# Altium PCB IcanStudioLive Controller.PcbDoc
Units mm, origin at the board's own origin, x right, y up, seen from the top; angles counter-clockwise.
Board outline 110.49 x 59.06 mm, 2 copper layers (Top Layer, Bottom Layer); 19 components, 23 nets, 109 pads, 1 vias.
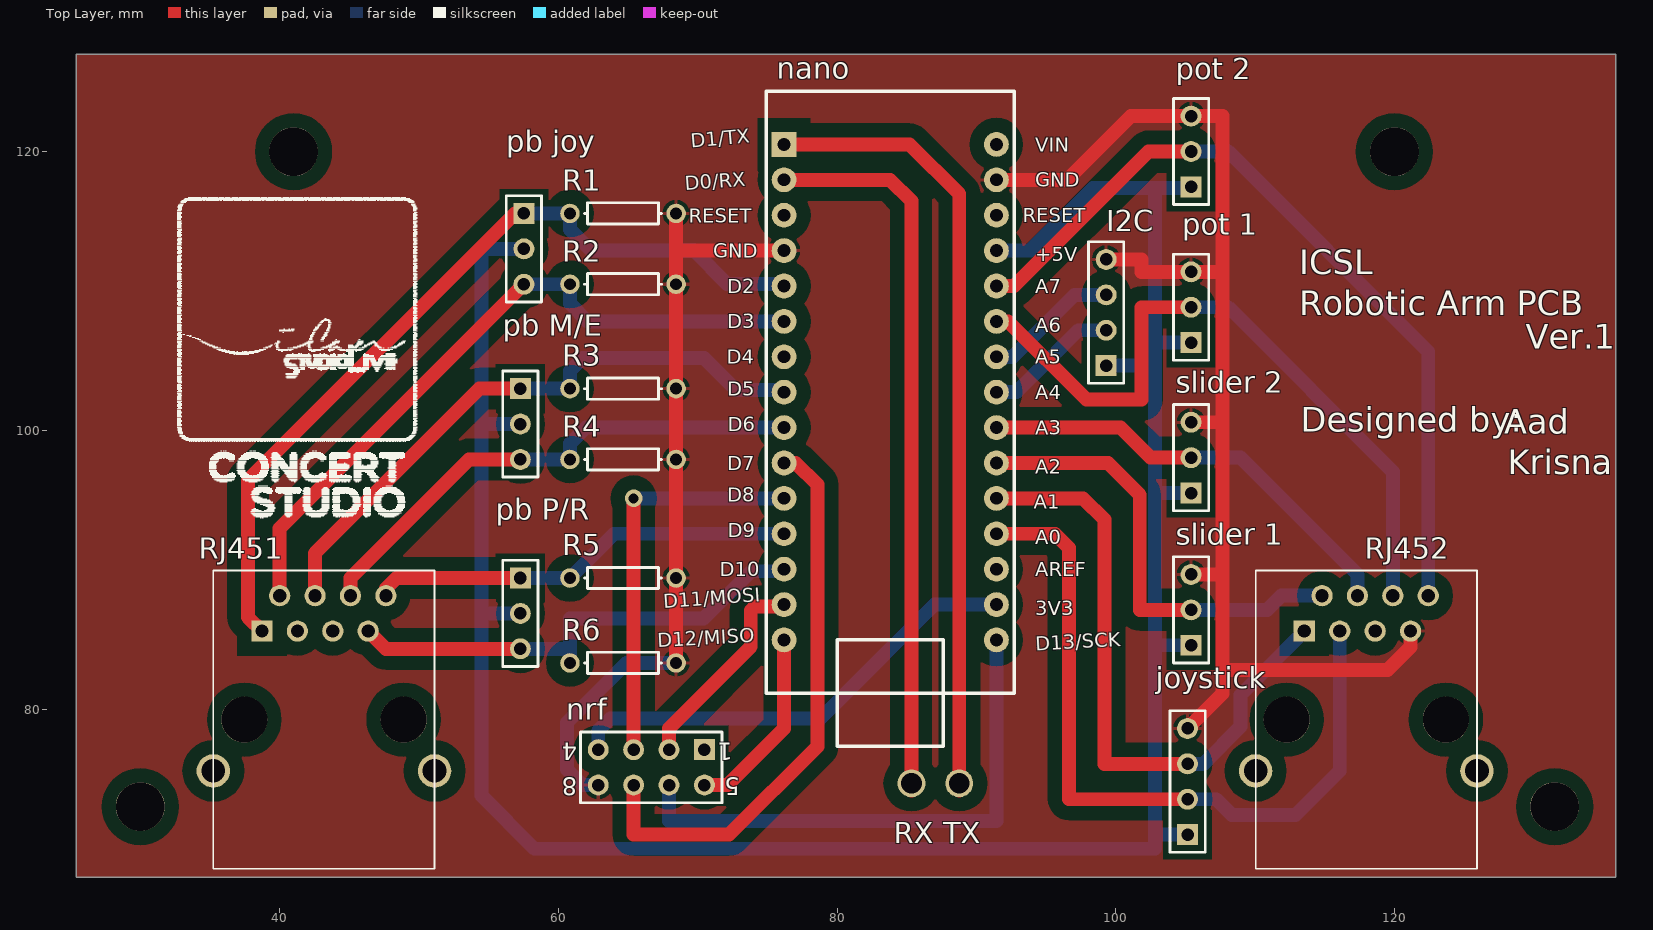
[diagram p0: Top Layer view]
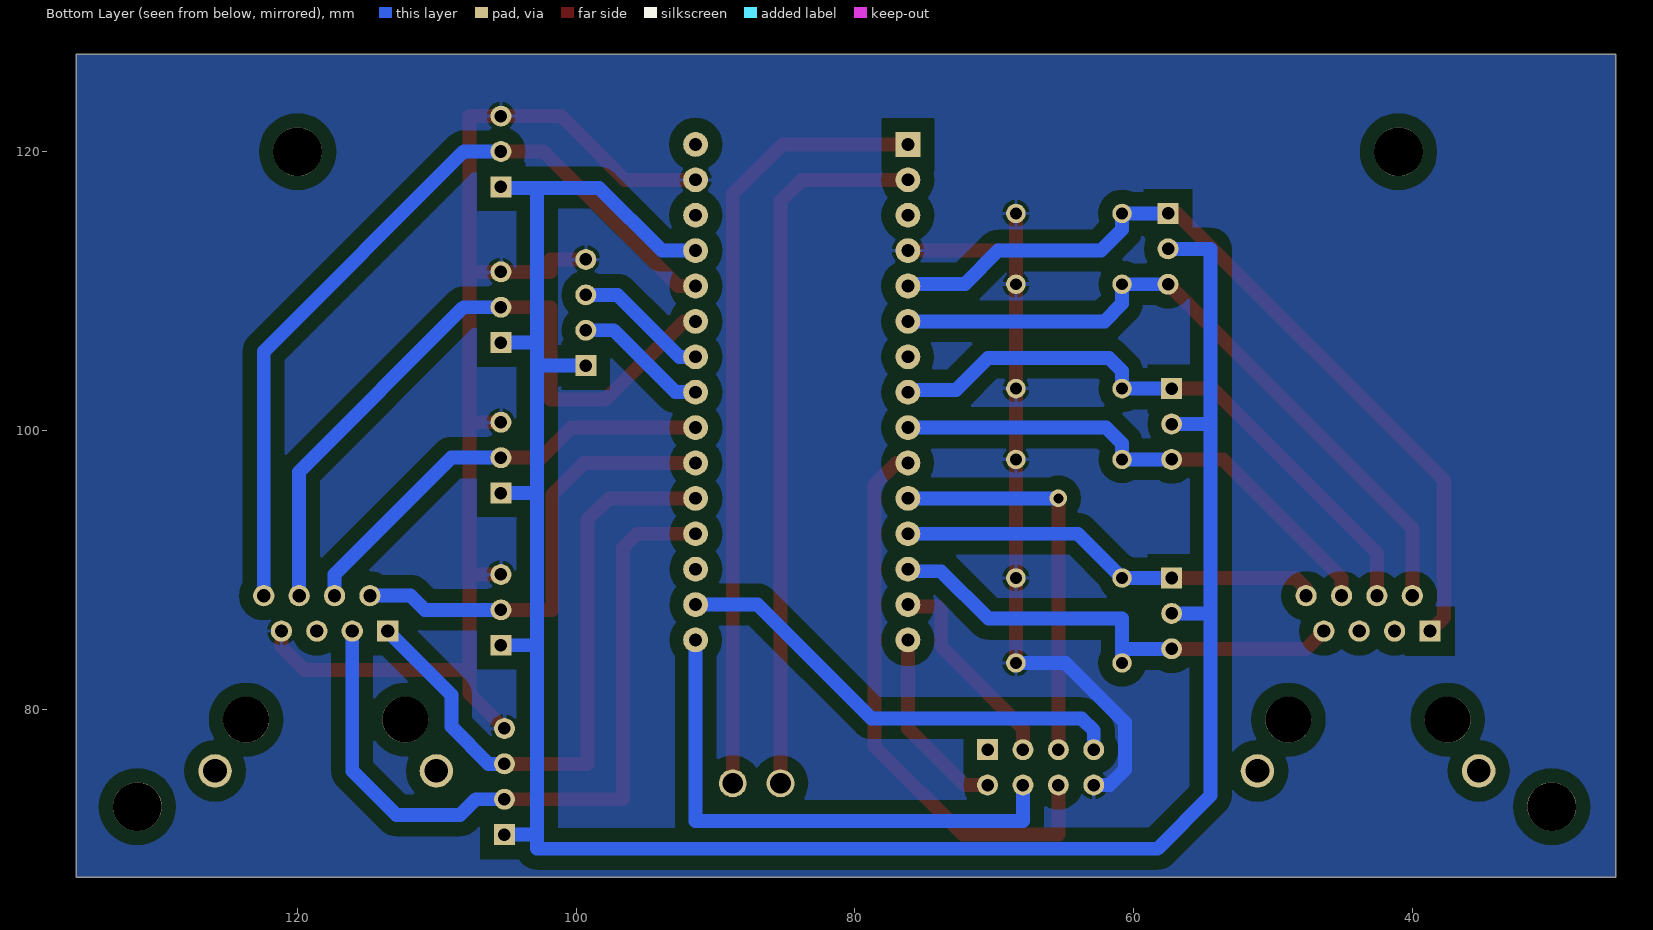
[diagram p1: Bottom Layer view, seen from below]

## Layer stack, top to bottom
Top Solder: solder mask 0.0102, Solder Resist, Dk 3.5
Top Layer: signal copper 0.0356
Dielectric 1: dielectric 0.32, FR-4, Dk 4.8
Bottom Layer: signal copper 0.0356
Bottom Solder: solder mask 0.0102, Solder Resist, Dk 3.5

## Board outline
25.4,67.945 135.89,67.945 135.89,127 25.4,127

## Design rules (kind name [scope] priority, off if disabled: settings)
Clearance [All] p1: gap=1
ComponentClearance [All] p1: gap=0.025 collisioncheckmode=3 verticalgap=0.254 showdistances=FALSE
PolygonConnect [All] p1: connectstyle=Relief reliefconductorwidth=0.254 reliefentries=4 polygonreliefangle="90 Angle" airgapwidth=0.254
RoutingVias [All] p1: holewidth=0.711 width=1.27 viastyle="Through Hole" minholewidth=0.711 minwidth=1.27 maxholewidth=0.711 maxwidth=1.27
SolderMaskExpansion [All] p1: expansion=0.102
UnpouredPolygon [All] p1: allowunpoured=FALSE
Width [All] p1: maxlimit=1 minlimit=1 preferedwidth=1
28 further rules are at their usual default settings.

## Components (designator, comment, footprint, x,y, rotation, side; value= is the part's Value field where it differs from the comment)
I2C "H i2c" HDR1X4 99.314,104.648 r90 top
joystick "H joystick" HDR1X4 105.156,70.993 r90 top
nano "" PCBComponent_1#1 1277.266,1315.212 r0 top
nrf "H NRF" HDR2X4_CEN 70.485,77.089 r180 top
"pb joy" "H pb joy" HDR1X3 57.531,115.57 r270 top
"pb M/E" "H pb menu enter" HDR1X3 57.277,102.997 r270 top (schematic designator "pb M E")
"pb P/R" "H pb play/rec" HDR1X3 57.277,89.408 r270 top (schematic designator "pb p/r")
"pot 1" "H potentio" HDR1X3 105.41,106.299 r90 top
"pot 2" "H potentio" HDR1X3 105.41,117.475 r90 top
R1 "ResPull" AXIAL-0.3 64.643,115.57 r180 top
R2 "ResPull" AXIAL-0.3 64.643,110.49 r180 top
R3 "ResPull" AXIAL-0.3 64.643,102.997 r180 top
R4 "ResPull" AXIAL-0.3 64.643,97.917 r180 top
R5 "ResPull" AXIAL-0.3 64.643,89.408 r180 top
R6 "ResPull" AXIAL-0.3 64.643,83.312 r180 top
RJ451 "RJ451" PCBComponent_1#2 38.735,85.598 r0 top
RJ452 "RJ452" PCBComponent_1#2 113.538,85.598 r0 top
"slider 1" "H slider" HDR1X3 105.41,84.582 r90 top
"slider 2" "H slider" HDR1X3 105.41,95.504 r90 top

## Footprints (in the part's own frame and the unit in brackets; to place one, negate y for a bottom-side part, rotate by r counter-clockwise, add the part's x,y. Pads: shape width x height; smd on the part's side, far side on the other; paste and mask are expansions set on the pad)
AXIAL-0.3 [mm] "Axial Device, Thru-Hole; 2 Leads; 0.3 in Pin Spacing"
  round 1.4 hole 0.85: 1(-3.81,0) 2(3.81,0)
  silkscreen extent -2.77,-0.76 2.77,0.76
HDR1X3 [mm] "Connector; Header; 3 Position"
  rect 1.5x1.5 hole 0.9: 1(0,0)
  round 1.5 hole 0.9: 2(2.54,0) 3(5.08,0)
  silkscreen extent -1.27,-1.27 6.35,1.27
HDR1X4 [mm] "Connector; Header; 4 Position"
  rect 1.5x1.5 hole 0.9: 1(0,0)
  round 1.5 hole 0.9: 2(2.54,0) 3(5.08,0) 4(7.62,0)
  silkscreen extent -1.27,-1.27 8.89,1.27
HDR2X4_CEN [mm] "Connector; Header; 4x2 Position"
  rect 1.5x1.5 hole 0.9: 1(0,0)
  round 1.5 hole 0.9: 2(2.54,0) 3(5.08,0) 4(7.62,0) 5(0,2.54) 6(2.54,2.54) 7(5.08,2.54) 8(7.62,2.54)
  silkscreen extent -1.27,-1.27 8.89,3.81
PCBComponent_1#1 [mil]
  rect 70x70 hole 36: 1(-47286.05,-47035)
  round 70 hole 36: 2(-47286.05,-47135) 3(-47286.05,-47235) 4(-47286.05,-47335) 5(-47286.05,-47435) 6(-47286.05,-47535) 7(-47286.05,-47635) 8(-47286.05,-47735) 9(-47286.05,-47835) 10(-47286.05,-47935) 11(-47286.05,-48035) 12(-47286.05,-48135) 13(-47286.05,-48235) 14(-47286.05,-48335) 15(-47286.05,-48435) 16(-46686.05,-48435) 17(-46686.05,-48335) 18(-46686.05,-48235) 19(-46686.05,-48135) 20(-46686.05,-48035) 21(-46686.05,-47935) 22(-46686.05,-47835) 23(-46686.05,-47735) 24(-46686.05,-47635) 25(-46686.05,-47535) 26(-46686.05,-47435) 27(-46686.05,-47335) 28(-46686.05,-47235) 29(-46686.05,-47135) 30(-46686.05,-47035)
  silkscreen extent -47336,-48735 -46636,-46885
PCBComponent_1#2 [mil]
  round 94.49 hole 66.93: 0(-137.6,-394.88) 0(487.6,-394.88)
  rect 60x60 hole 37.4: 1(0,0)
  round 60 hole 37.4: 2(50,100) 3(100,0) 4(150,100) 5(200,0) 6(250,100) 7(300,0) 8(350,100)
  round 129.92 hole 129.92 unplated: ""(-50,-250) ""(400,-250)
  silkscreen extent -138,-671 488,171

## Part data
I2C joystick: library part "Header 4", "Header, 4-Pin"
nano: library part ARDUINO_NANO
nrf: library part "Header 4X2A", "Header, 4-Pin, Dual row"
"pb joy" "pb M/E" "pb P/R" "pot 1" "pot 2" "slider 1" "slider 2": library part "Header 3", "Header, 3-Pin"
R1 R2 R3 R4 R5 R6: library part Res1, "Resistor"
RJ451 RJ452: library part Component_1

## Free pads (board coordinates)
  round 3.5 hole 3.5 unplated mask+2: 0(30,73) 0(41,120) 0(131.5,73)
  round 2 hole 1.5: 0(85.344,74.676) 1(88.773,74.676)
  round 3.5 hole 3.5 unplated: 1(120,120)

## Via types
v1: diameter 1.27, hole 0.711, Top Layer to Bottom Layer, 1 vias

## Nets (pads, with @x,y where several pads share a name; then routed paths per layer and width w, separated by ;. In a path a pad name is that pad's centre, name@x,y a point inside that pad or via, vN(x,y) a via of type N, cw(c..) or ccw(c..) an arc to the next point about the centre after c; other vN are vias at no path point)
3.3V: nano.17 nrf.4 | length 33.5
  Bottom Layer w1: nrf.4 62.865,78.452 63.752,79.339 78.831,79.339 ; 78.994,79.502 86.995,87.503 nano.17
A0: joystick.2 nano.19 RJ452.3 | length 54.9
  Top Layer w1: nano.19 95.631,92.583 96.647,91.567 96.647,73.533 joystick.2
  Bottom Layer w1: joystick.2 107.188,73.533 108.331,72.39 112.903,72.39 116.078,75.565 RJ452.3
A1: joystick.3 nano.20 RJ452.1 | length 45.6
  Top Layer w1: nano.20@91.44,94.972 91.591,95.123 97.663,95.123 99.187,93.599 99.187,76.073 joystick.3
  Bottom Layer w1: joystick.3 106.299,76.073 108.966,78.74 108.966,81.026 RJ452.1
A2: "slider 1.2" nano.21 RJ452.2 | length 33
  Top Layer w1: nano.21 99.441,97.663 101.727,95.377 101.727,87.122 105.41,87.122
  Bottom Layer w1: 105.41,87.122 110.871,87.122 111.887,88.138 RJ452.2
A3: "slider 2.2" nano.22 RJ452.4 | length 31.8
  Top Layer w1: nano.22 100.33,100.203 102.489,98.044 105.41,98.044
  Bottom Layer w1: 105.41,98.044 108.966,98.044 117.348,89.662 RJ452.4
A4: I2C.2 nano.23 | length 9.7
  Bottom Layer w1: nano.23 92.871,102.743 97.316,107.188 I2C.2
A5: I2C.3 nano.24 | length 9.7
  Bottom Layer w1: nano.24 92.583,105.283 97.028,109.728 I2C.3
A6: "pot 1.2" nano.25 RJ452.6 | length 51.2
  Top Layer w1: nano.25 92.278,107.823 97.898,102.203 101.854,102.203 101.854,108.839 105.41,108.839
  Bottom Layer w1: 105.41,108.839 108.077,108.839 119.888,97.028 RJ452.6
A7: "pot 2.2" nano.26 RJ452.8 | length 58.5
  Top Layer w1: nano.26 92.71,110.363 102.362,120.015 105.41,120.015
  Bottom Layer w1: 105.41,120.015 108.077,120.015 122.428,105.664 RJ452.8
D2: "pb joy.1" nano.5 R1.2 RJ451.1 | length 60.2
  Top Layer w1: RJ451.1 37.743,86.59 37.743,96.424 56.889,115.57 57.531,115.57
  Bottom Layer w1: 57.531,115.57 R1.2 60.833,114.427 62.357,112.903 69.723,112.903 72.112,110.514 nano.5@76.049,110.514
D3: "pb joy.3" nano.6 R2.2 RJ451.2 | length 50.2
  Top Layer w1: RJ451.2 40.005,92.964 57.531,110.49
  Bottom Layer w1: 57.531,110.49 R2.2 60.833,109.093 62.103,107.823 nano.6
D4: nano.7
D5: "pb M/E.1" nano.8 R3.2 RJ451.4 | length 44.1
  Top Layer w1: RJ451.4 42.545,91.186 54.356,102.997 57.277,102.997
  Bottom Layer w1: 57.277,102.997 R3.2 60.833,104.267 61.763,105.197 70.444,105.197 72.747,102.894 nano.8@76.049,102.894
D6: "pb M/E.3" nano.9 R4.2 RJ451.6 | length 37.5
  Top Layer w1: RJ451.6 45.085,89.408 53.594,97.917 57.277,97.917
  Bottom Layer w1: 57.277,97.917 R4.2 60.833,99.06 61.976,100.203 nano.9
D7: nano.10 nrf.7 | length 41.4
  Top Layer w1: nrf.7 65.405,70.993 72.263,70.993 78.589,77.319 78.589,96.113 77.039,97.663 nano.10
  Bottom Layer w1: nano.10 nano.10@76.351,97.512
D8: nano.11 nrf.3 | length 29
  Top Layer w1: nrf.3 v1(65.405,95.123)
  Bottom Layer w1: v1(65.405,95.123) nano.11 nano.11@76.351,94.972
D9: "pb P/R.1" nano.12 R5.2 RJ451.8 | length 30.7
  Top Layer w1: RJ451.8 47.625,88.646 48.387,89.408 57.277,89.408
  Bottom Layer w1: 57.277,89.408 R5.2 64.008,92.583 nano.12
D10: "pb P/R.3" nano.13 R6.2 RJ451.7 | length 34.8
  Top Layer w1: RJ451.7 47.625,84.328 57.277,84.328
  Bottom Layer w1: 57.277,84.328 60.833,84.328 ; R6.2 60.833,84.328 ; nano.13@76.049,89.892 73.811,89.892 70.406,86.487 60.833,86.487 60.833,84.328
D11: nano.14 nrf.2 | length 14.8
  Top Layer w1: nrf.2 67.945,78.613 73.811,84.479 73.811,87.078 74.085,87.352 nano.14@76.049,87.352
D12: nano.15 nrf.5 | length 13.7
  Top Layer w1: nrf.5 72.136,74.549 76.2,78.613 nano.15
D13: nano.16 nrf.6 | length 39.1
  Bottom Layer w1: nrf.6 67.945,71.977 91.44,71.977 nano.16
GND: "pot 1.3" "pot 2.3" "slider 1.3" "slider 2.3" I2C.4 joystick.4 nano.4 nano.29 nrf.8 R1.1 R2.1 R3.1 R4.1 R5.1 R6.1 RJ452.7 | length 147.7
  Top Layer w1: R6.1 R5.1 R4.1 R3.1 R2.1 68.453,112.903 ; R1.1 68.453,112.903 ; nano.4 68.453,112.903 ; nano.29 96.52,117.983 101.092,122.555 105.41,122.555 107.66,122.555 107.66,100.584 ; I2C.4 101.854,112.268 101.854,111.379 105.41,111.379 107.533,111.379 ; joystick.4 107.66,81.117 107.66,82.804 ; 105.41,89.662 107.569,89.662 ; 105.41,100.584 107.66,100.584 ; RJ452.7 121.158,84.455 119.507,82.804 107.66,82.804 ; 107.569,89.662 107.66,89.753 107.66,100.584 ; 107.569,89.662 107.66,89.571 107.66,82.804
  Bottom Layer w1: nrf.8 61.722,74.549 60.615,75.656 60.615,79.03 64.897,83.312 R6.1
VCC: "pb joy.2" "pb M/E.2" "pb P/R.2" "pot 1.1" "pot 2.1" "slider 1.1" "slider 2.1" I2C.1 joystick.1 nano.27 | length 174
  Bottom Layer w1: 54.737,100.457 57.277,100.457 ; 57.277,86.868 54.483,86.868 ; 57.531,113.03 54.483,113.03 54.483,86.868 ; nano.27 93.853,112.903 98.361,117.411 102.806,117.411 ; I2C.1 102.425,104.648 102.806,105.029 ; 102.933,70.993 joystick.1 ; 102.933,84.582 105.41,84.582 ; 102.933,95.504 105.41,95.504 ; 102.933,106.299 105.41,106.299 ; 105.346,117.411 102.806,117.411 ; 54.483,86.868 54.483,73.787 58.293,69.977 102.806,69.977 102.806,105.029 ; 102.806,105.029 102.806,117.411
pads on no net: nano.1 nano.2 nano.3 nano.18 nano.28 nano.30 nrf.1 RJ451. RJ451.0 RJ451.3 RJ451.5 RJ452. RJ452.0 RJ452.5
copper on no net: | length 108.9
  Top Layer w1: 76.2,117.983 83.82,117.983 85.344,116.459 85.344,74.168 ; 76.2,120.523 85.217,120.523 88.773,116.967 88.773,78.359 88.773,74.168

## Polygon pours and split planes (outlines as drawn)
GND on Top Layer "Top Layer-No Net" (solid, pour order 2): 25.4,127 25.4,67.945 135.89,67.945 135.89,127 25.4,127
GND on Bottom Layer "Top Layer-No Net" (solid, pour order 4): 25.4,127 25.4,67.945 135.89,67.945 135.89,127 25.4,127

## Silkscreen, mask and mechanical layers (free items; w line width, h text height)
Top Overlay:
  drawing of 1443 lines, arcs and shapes, not listed
  text "ICSL" at 113.157,110.617 h3
  text "Robotic Arm PCB" at 113.157,107.696 h3
  text "Ver.1" at 129.413,105.283 h3
  text "Designed by:" at 113.284,99.314 h3
  text "Aad" at 127.889,99.187 h3
  text "Krisna" at 128.143,96.266 h3
  text "RX" at 84.074,70.358 h1.52
  text "TX" at 87.63,70.358 h1.52

## Dimensions
25.4,127 to 135.89,127 on Top Overlay
135.89,127 to 135.89,67.945 on Top Overlay
119.888,121.92 to 119.888,117.983 on Top Overlay
128.651,74.93 to 128.651,70.993 on Top Overlay
26.289,74.93 to 26.289,70.993 on Top Overlay
38.989,118.364 to 42.926,118.364 on Top Overlay

## Text inside footprints (layer, text, board x,y; h text height)
nano: Top Overlay "RESET" at 93.345,114.935 h1.02; Top Overlay "A7" at 94.234,109.855 h1.02; Top Overlay "A6" at 94.234,107.061 h1.02; Top Overlay "A5" at 94.234,104.775 h1.02; Top Overlay "A4" at 94.234,102.235 h1.02; Top Overlay "A3" at 94.234,99.695 h1.02; Top Overlay "A2" at 94.234,96.901 h1.02; Top Overlay "A1" at 94.134,94.361 h1.02; Top Overlay "A0" at 94.234,91.821 h1.02; Top Overlay "AREF" at 94.234,89.535 h1.02; Top Overlay "3V3" at 94.234,86.741 h1.02; Top Overlay "D11/MOSI" at 67.561,87.25 h1.02 r4; Top Overlay "D10" at 71.59,89.535 h1.02; Top Overlay "D9" at 72.172,92.329 h1.02; Top Overlay "D8" at 72.126,94.869 h1.02; Top Overlay "D7" at 72.126,97.155 h1.02; Top Overlay "D6" at 72.172,99.949 h1.02; Top Overlay "D5" at 72.126,102.489 h1.02; Top Overlay "D4" at 72.08,104.775 h1.02; Top Overlay "D3" at 72.126,107.315 h1.02; Top Overlay "D2" at 72.126,109.855 h1.02; Top Overlay "RESET" at 69.365,114.889 h1.02; Top Overlay "D0/RX" at 69.123,117.245 h1.02 r4; Top Overlay "GND" at 71.128,112.395 h1.02; Top Overlay "D13/SCK" at 94.261,84.202 h1.02 r3; Top Overlay "VIN" at 94.234,120.015 h1.02; Top Overlay "D12/MISO" at 67.136,84.456 h1.02 r3; Top Overlay "+5V" at 94.234,112.141 h1.02; Top Overlay "GND" at 94.234,117.475 h1.02; Top Overlay "D1/TX" at 69.546,120.294 h1.02 r5
nrf: Top Overlay "8" at 61.341,75.057 h1.27 r180; Top Overlay "4" at 61.341,77.597 h1.27 r180; Top Overlay "1" at 72.517,77.597 h1.27 r180; Top Overlay "5" at 73.025,75.057 h1.27 r180